# EAGLE board axiom_beta_power_board_v1.25-Min.b0de7db6 (EAGLE 7.7.0), part 1 of 5
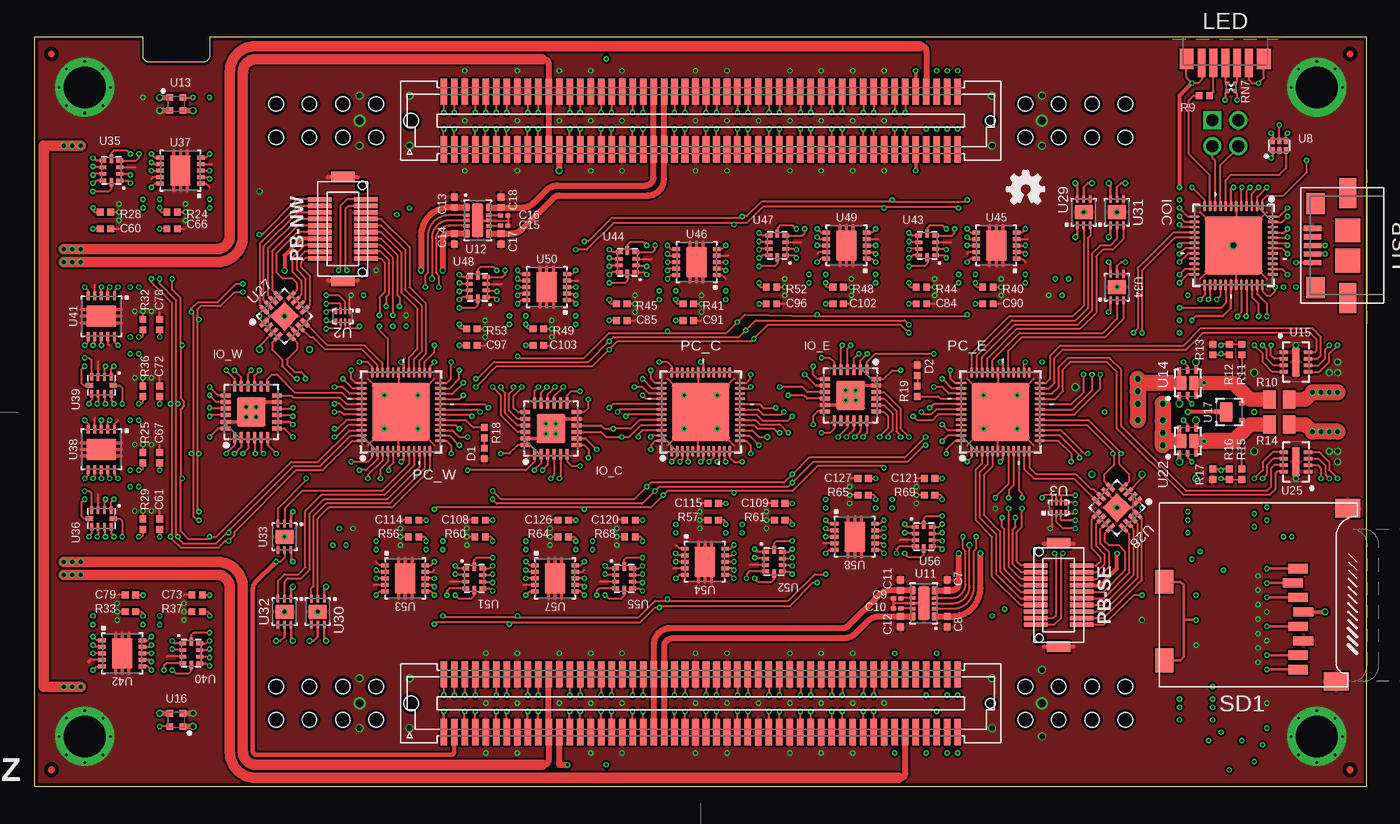
[diagram p0: board, top side]
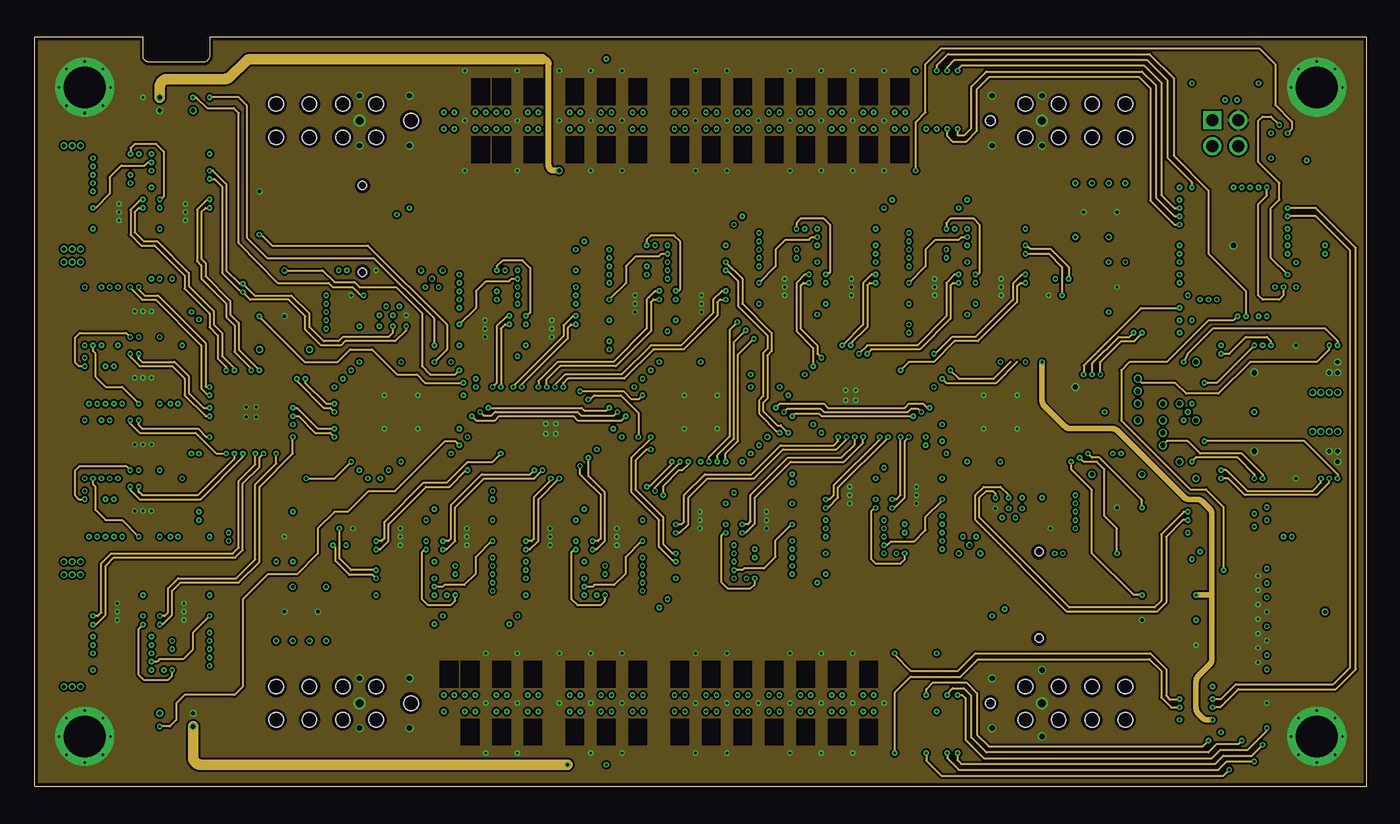
[diagram p1: board, inner layer Route2]
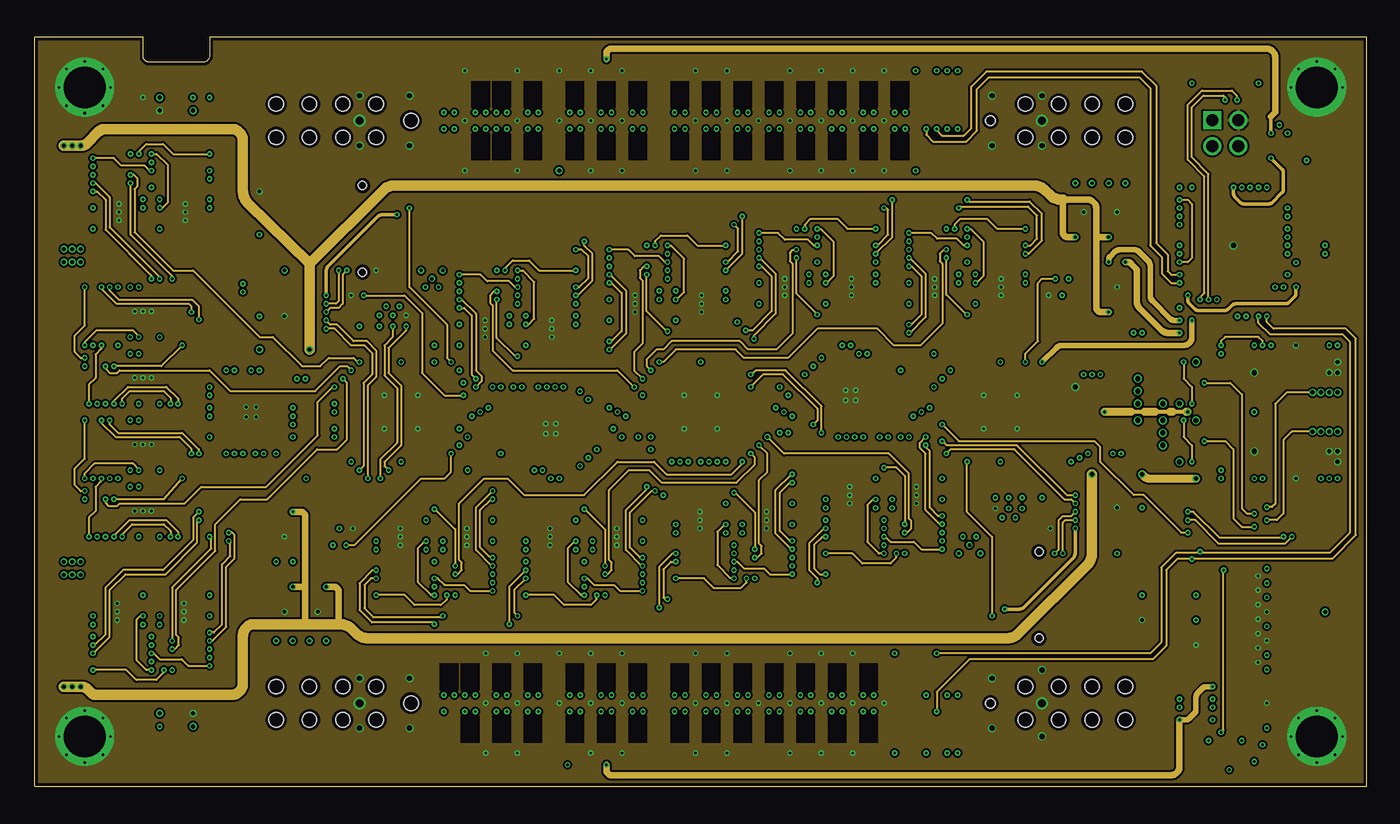
[diagram p2: board, inner layer Route15]
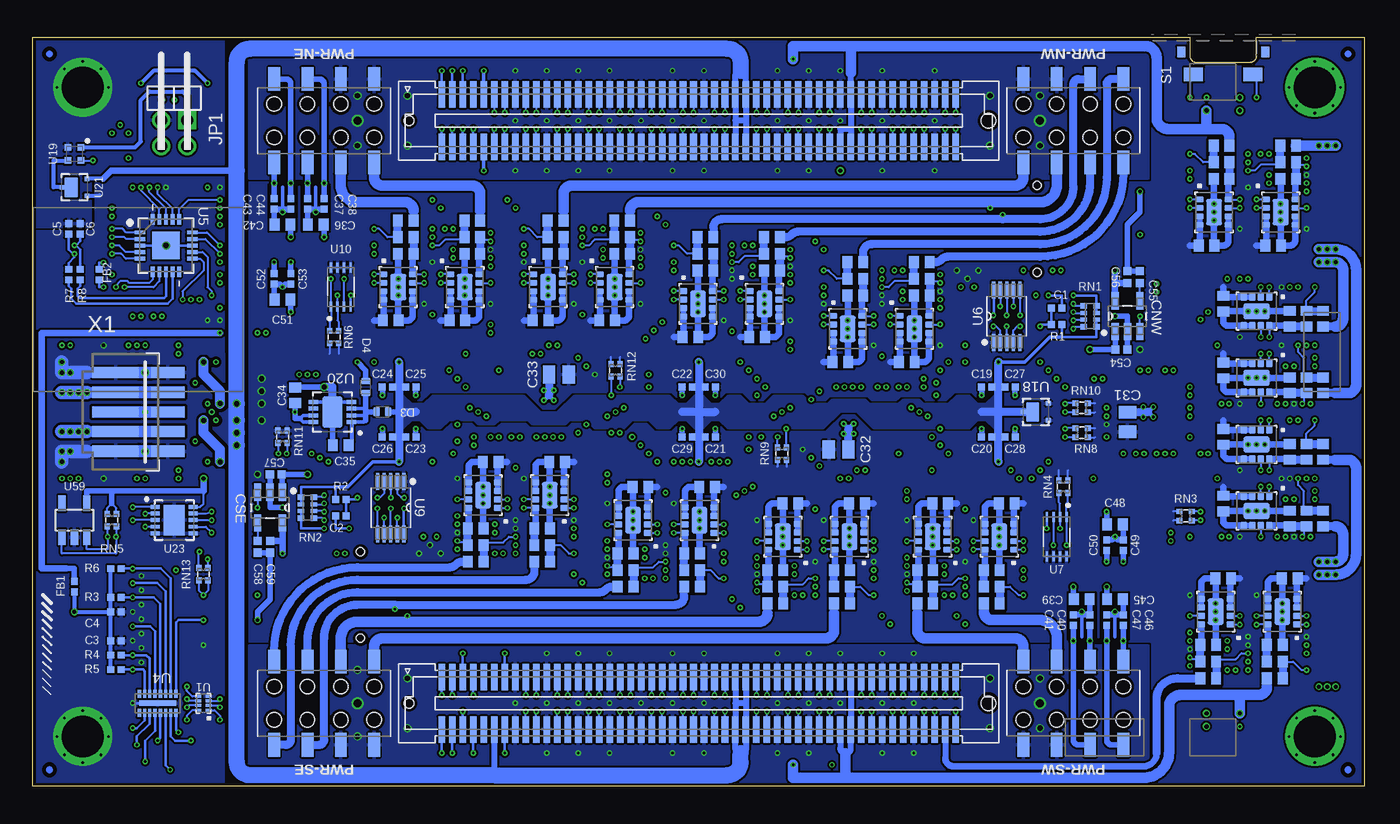
[diagram p3: board, bottom side, seen from below]

Size 101.6 x 57.15 mm. Coordinates in mm from the lower left corner, seen from the top.
Outline: 101.6,57.15 13.33,57.15 13.33,55.75 arc-90 12.83,55.25 8.76,55.25 arc-90 8.25,55.75 8.25,57.15 0,57.15 0,0 101.6,0 101.6,57.15
Copper layers (1*2*15*16): Top 0.035559375mm / dielectric 0.17018125mm / Route2 0.01778125mm / dielectric 47mil / Route15 0.01778125mm / dielectric 0.17018125mm / Bottom 0.035559375mm
Design rules "OSHPark-4layer-tuned *": minimum track width 5mil, minimum drill 8mil, track to track 6mil, track to pad 5mil, pad to pad 5mil, via to via 5mil, smd to smd 0mil, copper to edge 10mil, drill to drill 6mil, minimum pad ring 4mil, minimum via ring 4mil, stop-mask expansion 2mil, vias tented up to drill 25mil, thermal gap 6mil
Net classes: 1 LVDS: width 0.152 mm, drill 0.203 mm, clearance 0.152 mm
tKeepout: area 1.3,50.8 to 6.3,55.9; area 1.3,1.3 to 6.3,6.3; area 95.2,1.3 to 100.3,6.3; area 95.2,50.8 to 100.3,55.9
bKeepout: area 95.2,50.8 to 100.3,55.9; area 95.2,1.3 to 100.3,6.3; area 1.3,1.3 to 6.3,6.3; area 1.3,50.8 to 6.3,55.9

## Footprints (pad centres in the part's own frame; a part is rotated, then mirrored left to right if it is on the bottom)
µZ-SOCKET-NOHOLES-R = smd 0.5 x 2: 1 19.6,24.425; 2 19.6,20.027; 3 18.8,24.425; 4 18.8,20.027; 5 18,24.425; 6 18,20.027; 7 17.2,24.425; 8 17.2,20.027; 9 16.4,24.425; 10 16.4,20.027; 11 15.6,24.425; 12 15.6,20.027; 13 14.8,24.425; 14 14.8,20.027; 15 14,24.425; 16 14,20.027; 17 13.2,24.425; 18 13.2,20.027; 19 12.4,24.425; 20 12.4,20.027; 21 11.6,24.425; 22 11.6,20.027; 23 10.8,24.425; 24 10.8,20.027; 25 10,24.425; 26 10,20.027; 27 9.2,24.425; 28 9.2,20.027; 29 8.4,24.425; 30 8.4,20.027; 31 7.6,24.425; 32 7.6,20.027; 33 6.8,24.425; 34 6.8,20.027; 35 6,24.425; 36 6,20.027; 37 5.2,24.425; 38 5.2,20.027; 39 4.4,24.425; 40 4.4,20.027; 41 3.6,24.425; 42 3.6,20.027; 43 2.8,24.425; 44 2.8,20.027; 45 2,24.425; 46 2,20.027; 47 1.2,24.425; 48 1.2,20.027; 49 0.4,24.425; 50 0.4,20.027; 51 -0.4,24.425; 52 -0.4,20.027; 53 -1.2,24.425; 54 -1.2,20.027; 55 -2,24.425; 56 -2,20.027; 57 -2.8,24.425; 58 -2.8,20.027; 59 -3.6,24.425; 60 -3.6,20.027; 61 -4.4,24.425; 62 -4.4,20.027; 63 -5.2,24.425; 64 -5.2,20.027; 65 -6,24.425; 66 -6,20.027; 67 -6.8,24.425; 68 -6.8,20.027; 69 -7.6,24.425; 70 -7.6,20.027; 71 -8.4,24.425; 72 -8.4,20.027; 73 -9.2,24.425; 74 -9.2,20.027; 75 -10,24.425; 76 -10,20.027; 77 -10.8,24.425; 78 -10.8,20.027; 79 -11.6,24.425; 80 -11.6,20.027; 81 -12.4,24.425; 82 -12.4,20.027; 83 -13.2,24.425; 84 -13.2,20.027; 85 -14,24.425; 86 -14,20.027; 87 -14.8,24.425; 88 -14.8,20.027; 89 -15.6,24.425; 90 -15.6,20.027; 91 -16.4,24.425; 92 -16.4,20.027; 93 -17.2,24.425; 94 -17.2,20.027; 95 -18,24.425; 96 -18,20.027; 97 -18.8,24.425; 98 -18.8,20.027; 99 -19.6,24.425; 100 -19.6,20.027; 101 19.6,-20.025; 102 19.6,-24.425; 103 18.8,-20.027; 104 18.8,-24.425; 105 18,-20.027; 106 18,-24.425; 107 17.2,-20.027; 108 17.2,-24.425; 109 16.4,-20.027; 110 16.4,-24.425; 111 15.6,-20.027; 112 15.6,-24.425; 113 14.8,-20.027; 114 14.8,-24.425; 115 14,-20.027; 116 14,-24.425; 117 13.2,-20.027; 118 13.2,-24.425; 119 12.4,-20.027; 120 12.4,-24.425; 121 11.6,-20.027; 122 11.6,-24.425; 123 10.8,-20.027; 124 10.8,-24.425; 125 10,-20.027; 126 10,-24.425; 127 9.2,-20.027; 128 9.2,-24.425; 129 8.4,-20.027; 130 8.4,-24.425; 131 7.6,-20.027; 132 7.6,-24.425; 133 6.8,-20.027; 134 6.8,-24.425; 135 6,-20.027; 136 6,-24.425; 137 5.2,-20.027; 138 5.2,-24.425; 139 4.4,-20.027; 140 4.4,-24.425; 141 3.6,-20.027; 142 3.6,-24.425; 143 2.8,-20.027; 144 2.8,-24.425; 145 2,-20.027; 146 2,-24.425; 147 1.2,-20.027; 148 1.2,-24.425; 149 0.4,-20.027; 150 0.4,-24.425; 151 -0.4,-20.027; 152 -0.4,-24.425; 153 -1.2,-20.027; 154 -1.2,-24.425; 155 -2,-20.027; 156 -2,-24.425; 157 -2.8,-20.027; 158 -2.8,-24.425; 159 -3.6,-20.027; 160 -3.6,-24.425; 161 -4.4,-20.027; 162 -4.4,-24.425; 163 -5.2,-20.027; 164 -5.2,-24.425; 165 -6,-20.027; 166 -6,-24.425; 167 -6.8,-20.027; 168 -6.8,-24.425; 169 -7.6,-20.027; 170 -7.6,-24.425; 171 -8.4,-20.027; 172 -8.4,-24.425; 173 -9.2,-20.027; 174 -9.2,-24.425; 175 -10,-20.027; 176 -10,-24.425; 177 -10.8,-20.027; 178 -10.8,-24.425; 179 -11.6,-20.027; 180 -11.6,-24.425; 181 -12.4,-20.027; 182 -12.4,-24.425; 183 -13.2,-20.027; 184 -13.2,-24.425; 185 -14,-20.027; 186 -14,-24.425; 187 -14.8,-20.027; 188 -14.8,-24.425; 189 -15.6,-20.027; 190 -15.6,-24.425; 191 -16.4,-20.027; 192 -16.4,-24.425; 193 -17.2,-20.027; 194 -17.2,-24.425; 195 -18,-20.027; 196 -18,-24.425; 197 -18.8,-20.027; 198 -18.8,-24.425; 199 -19.6,-20.027; 200 -19.6,-24.425 | hole 0.725: 22.1,22.225; 22.1,-22.225 | hole 1.125: -22.1,22.225; -22.1,-22.225
0402-C = smd 0.52 x 0.52: 1 -0.4,0; 2 0.4,0
0201-C = smd 0.36 x 0.32: 1 -0.28,0; 2 0.28,0
0805-C = smd 0.95 x 1.35: 1 -0.75,0; 2 0.75,0
0603-C = smd 0.75 x 0.9: 1 -0.6,0; 2 0.6,0
0402-B = smd 0.62 x 0.62: 1 -0.45,0; 2 0.45,0
SOT95P280X145-5N = smd 1.321 x 0.559: 1 -1.168,0.94; 2 -1.168,0; 3 -1.168,-0.94; 4 1.168,-0.94; 5 1.168,0.94
DFN1006D-2 = smd 0.5 x 0.7: A 0.45,0; C -0.45,0
QFN50P400X400X80-25N-NSM = smd 0.813 x 0.305: 1 -1.95,1.25; 2 -1.95,0.75; 3 -1.95,0.25; 4 -1.95,-0.25; 5 -1.95,-0.75; 6 -1.95,-1.25; 13 1.95,-1.25; 14 1.95,-0.75; 15 1.95,-0.25; 16 1.95,0.25; 17 1.95,0.75; 18 1.95,1.25 | smd 0.305 x 0.813: 7 -1.25,-1.95; 8 -0.75,-1.95; 9 -0.25,-1.95; 10 0.25,-1.95; 11 0.75,-1.95; 12 1.25,-1.95; 19 1.25,1.95; 20 0.75,1.95; 21 0.25,1.95; 22 -0.25,1.95; 23 -0.75,1.95; 24 -1.25,1.95 | smd 2.2 x 2.2: 25 0,0
UQFN40P600X600X100-49N-NSM = smd 0.8 x 0.2: 1 -3,2.2; 2 -3,1.8; 3 -3,1.4; 4 -3,1; 5 -3,0.6; 6 -3,0.2; 7 -3,-0.2; 8 -3,-0.6; 9 -3,-1; 10 -3,-1.4; 11 -3,-1.8; 12 -3,-2.2; 25 3,-2.2; 26 3,-1.8; 27 3,-1.4; 28 3,-1; 29 3,-0.6; 30 3,-0.2; 31 3,0.2; 32 3,0.6; 33 3,1; 34 3,1.4; 35 3,1.8; 36 3,2.2 | smd 0.2 x 0.8: 13 -2.2,-3; 14 -1.8,-3; 15 -1.4,-3; 16 -1,-3; 17 -0.6,-3; 18 -0.2,-3; 19 0.2,-3; 20 0.6,-3; 21 1,-3; 22 1.4,-3; 23 1.8,-3; 24 2.2,-3; 37 2.2,3; 38 1.8,3; 39 1.4,3; 40 1,3; 41 0.6,3; 42 0.2,3; 43 -0.2,3; 44 -0.6,3; 45 -1,3; 46 -1.4,3; 47 -1.8,3; 48 -2.2,3 | smd 4.4 x 4.4: EP 0,0
2X02M/90-S = drill 0.914 square: 1 1,1 | drill 0.914: 2 1,-1; 3 -1,1; 4 -1,-1
MSL0104 = smd 1.06 x 1.58: 1 -2.95,-1; 7 2.95,-1 | smd 0.6 x 2.18: 2 -1.8,-1.3; 3 -0.9,-1.3; 4 0,-1.3; 5 0.9,-1.3; 6 1.8,-1.3
DF12(XX)-20DP-0.5V = smd 1.8 x 0.35: 1 -1.75,2.25; 2 1.75,2.25; 3 -1.75,1.75; 4 1.75,1.75; 5 -1.75,1.25; 6 1.75,1.25; 7 -1.75,0.75; 8 1.75,0.75; 9 -1.75,0.25; 10 1.75,0.25; 11 -1.75,-0.25; 12 1.75,-0.25; 13 -1.75,-0.75; 14 1.75,-0.75; 15 -1.75,-1.25; 16 1.75,-1.25; 17 -1.75,-1.75; 18 1.75,-1.75; 19 -1.75,-2.25; 20 1.75,-2.25 | smd 1.8 x 0.8: M1 0,3.95; M2 0,-3.95 | hole 0.625: 1.5,-3.3; 1.5,3.3
R2X04 = smd 0.9 x 1.8: 1 -3.81,3.175; 2 -3.81,-3.175; 3 -1.27,3.175; 4 -1.27,-3.175; 5 1.27,3.175; 6 1.27,-3.175; 7 3.81,3.175; 8 3.81,-3.175 | hole 1.1: -3.81,1.27; -1.27,1.27; -1.27,-1.27; -3.81,-1.27; 1.27,1.27; 1.27,-1.27; 3.81,1.27; 3.81,-1.27
4X0402ARV341 = smd 0.4 x 0.5: 1 -0.8,-0.5; 4 0.8,-0.5; 5 0.8,0.5; 8 -0.8,0.5 | smd 0.3 x 0.5: 2 -0.25,-0.5; 3 0.25,-0.5; 6 0.25,0.5; 7 -0.25,0.5
EXB24V = smd 0.4 x 0.45: 1 -0.35,-0.475; 2 0.35,-0.475; 3 0.35,0.475; 4 -0.35,0.475
EXB14V = smd 0.3 x 0.3: 1 -0.3,-0.3; 2 0.3,-0.3; 3 0.3,0.3; 4 -0.3,0.3
SKSNLAE010 = smd 1.45 x 1.05: 1 -2.275,2.575; 2 2.275,2.575 | smd 0.6 x 0.8: 3 -3.2,0.85; 4 3.2,0.85
TF-MICRO-SD_PP2 = smd 0.7 x 1.5: 1 9,-10.64; 2 7.9,-10.24; 3 6.8,-10.64; 4 5.7,-11.04; 5 4.6,-10.64; 6 3.5,-11.04; 7 2.4,-10.64; 8 1.3,-10.64 | smd 1.8 x 1.4: CD1 2,-0.44; CD2 8,-0.44 | smd 1.4 x 1.9: MT1 0.4,-13.54; MT2 13.6,-14.44
X2SON-8 = smd 0.2 x 0.52: 1 -0.525,-0.4; 2 -0.175,-0.4; 3 0.175,-0.4; 4 0.525,-0.4; 5 0.525,0.4; 6 0.175,0.4; 7 -0.175,0.4; 8 -0.525,0.4
UDFN-8 = smd 0.22 x 0.48: 1 -0.525,-0.43; 2 -0.175,-0.43; 3 0.175,-0.43; 4 0.525,-0.43; 5 0.525,0.43; 6 0.175,0.43; 7 -0.175,0.43; 8 -0.525,0.43
SON40P135X330X55-17N = smd 0.61 x 0.254: 1 -0.737,1.397; 2 -0.737,0.991; 3 -0.737,0.61; 4 -0.737,0.203; 5 -0.737,-0.203; 6 -0.737,-0.61; 7 -0.737,-0.991; 8 -0.737,-1.397; 9 0.737,-1.397; 10 0.737,-0.991; 11 0.737,-0.61; 12 0.737,-0.203; 13 0.737,0.203; 14 0.737,0.61; 15 0.737,0.991; 16 0.737,1.397 | smd 0.406 x 2.794: 17 0,0
QFN65P400X400X100-21N = smd 0.8 x 0.3: 1 -2,1; 2 -2,0.5; 3 -2,0; 4 -2,-0.5; 5 -2,-1; 11 2,-1; 12 2,-0.5; 13 2,0; 14 2,0.5; 15 2,1 | smd 0.3 x 0.8: 6 -1,-2; 7 -0.5,-2; 8 0,-2; 9 0.5,-2; 10 1,-2; 16 1,2; 17 0.5,2; 18 0,2; 19 -0.5,2; 20 -1,2 | smd 2.1 x 2.1: EP 0,0
SOP50P490X110-10N = smd 1.3 x 0.32: 1 -2,1; 2 -2,0.5; 3 -2,0; 4 -2,-0.5; 5 -2,-1; 6 2,-1; 7 2,-0.5; 8 2,0; 9 2,0.5; 10 2,1
SOT996-2/3 = smd 0.25 x 0.75: 1 -0.75,-1.5; 2 -0.25,-1.5; 3 0.25,-1.5; 4 0.75,-1.5; 5 0.75,1.5; 6 0.25,1.5; 7 -0.25,1.5; 8 -0.75,1.5
MICROPAK-6 = smd 0.3 x 0.5: 1 -0.5,-0.375; 2 0,-0.375; 3 0.5,-0.375; 4 0.5,0.375; 5 0,0.375; 6 -0.5,0.375
V-DFN3020-14 = smd 0.65 x 0.5: 1 -1,-0.85; 5 1,-0.85; 6 1,0.85; 10 -1,0.85 | smd 0.25 x 0.5: 2 -0.4,-0.85; 3 0,-0.85; 4 0.4,-0.85; 7 0.4,0.85; 8 0,0.85; 9 -0.4,0.85 | smd 2.55 x 0.9: EP 0,0
MLF-4 = smd 0.5 x 0.5: 1 -0.5,-0.5; 2 0.5,-0.5; 3 0.5,0.5; 4 -0.5,0.5
UDFN6 = smd 0.47 x 0.35: 1 -0.95,0.65; 2 -0.95,0; 3 -0.95,-0.65; 4 0.95,-0.65; 5 0.95,0; 6 0.95,0.65 | smd 1.1 x 0.75: D1 0,0.46; D2 0,-0.46
DFN8 = smd 0.25 x 0.7: 1 -0.75,-0.925; 2 -0.25,-0.925; 3 0.25,-0.925; 4 0.75,-0.925; 5 0.75,0.925; 6 0.25,0.925; 7 -0.25,0.925; 8 -0.75,0.925 | smd 2.2 x 0.6: EP 0,0
DFN2020D-3 = smd 0.45 x 0.35: 1 -0.95,0.65; 2 -0.95,-0.65; 3 0.95,0 | smd 1 x 1.5: 4 0.25,0
DFN3X3_8LEAD = smd 0.813 x 0.305: 1 -1.448,0.762; 2 -1.448,0.254; 3 -1.448,-0.254; 4 -1.448,-0.762; 5 1.448,-0.762; 6 1.448,-0.254; 7 1.448,0.254; 8 1.448,0.762 | smd 1.549 x 2.388: 9 0,0
DFN3X3_10LEAD = smd 0.7 x 0.3: 1 -1.45,1; 2 -1.45,0.5; 3 -1.45,0; 4 -1.45,-0.5; 5 -1.45,-1; 6 1.45,-1; 7 1.45,-0.5; 8 1.45,0; 9 1.45,0.5; 10 1.45,1 | smd 1.6 x 2.3: EPAD 0,0
QFN50P300X300X80-17N = smd 0.8 x 0.3: 1 -1.45,0.75; 2 -1.45,0.25; 3 -1.45,-0.25; 4 -1.45,-0.75; 9 1.45,-0.75; 10 1.45,-0.25; 11 1.45,0.25; 12 1.45,0.75 | smd 0.3 x 0.8: 5 -0.75,-1.45; 6 -0.25,-1.45; 7 0.25,-1.45; 8 0.75,-1.45; 13 0.75,1.45; 14 0.25,1.45; 15 -0.25,1.45; 16 -0.75,1.45 | smd 1.55 x 1.55: EP 0,0
DFN2018-6 = smd 0.25 x 0.55: 1 -0.5,-1; 2 0,-1; 3 0.5,-1; 4 0.5,1; 5 0,1; 6 -0.5,1 | smd 1.4 x 1.1: 10 0,0
X2QFN-10 = smd 0.3 x 0.58: 1 -0.75,-0.64; 4 0.75,-0.64; 6 0.75,0.64; 9 -0.75,0.64 | smd 0.25 x 0.58: 2 -0.25,-0.64; 3 0.25,-0.64; 7 0.25,0.64; 8 -0.25,0.64 | smd 0.64 x 0.35: 5 0.9,0; 10 -0.9,0
DFN-10 = smd 0.3 x 0.65: 1 -1,-1.55; 2 -0.5,-1.55; 3 0,-1.55; 4 0.5,-1.55; 5 1,-1.55; 6 1,1.55; 7 0.5,1.55; 8 0,1.55; 9 -0.5,1.55; 10 -1,1.55 | smd 2.3 x 1.6: EP 0,0
SOT23-5L = smd 0.55 x 1.2: 1 -0.95,-1.3; 2 0,-1.3; 3 0.95,-1.3; 4 0.95,1.3; 5 -0.95,1.3
MICROSIP = smd 0.48 x 0.58: 1 -0.975,-1.1; 2 -0.325,-1.1; 3 0.325,-1.1; 4 0.975,-1.1; 5 0.975,1.1; 6 0.325,1.1; 7 -0.325,1.1; 8 -0.975,1.1 | smd 2 x 1.2: EP 0,0
MICROSIP-DD = smd 0.48 x 0.58: 1 -0.975,-1.1; 2 -0.325,-1.1; 3 0.325,-1.1; 4 0.975,-1.1; 5 0.975,1.1; 6 0.325,1.1; 7 -0.325,1.1; 8 -0.975,1.1 | smd 2 x 1.2: EP 0,0
MICRO-AB-H-SMT = smd 0.4 x 1.35: 1 -1.3,4.125; 2 -0.65,4.125; 3 0,4.125; 4 0.65,4.125; 5 1.3,4.125 | smd 2.3 x 1.3: Z1 -4,1.45; Z4 4,1.45 | smd 1.8 x 1.9: Z2 -1.15,1.45; Z3 1.15,1.45 | smd 1.6 x 1.4: Z5 -3.2,3.9; Z6 3.2,3.9
PICO-SPOX-5 = smd 0.85 x 2.55: 1 -3,-6.5; 2 -1.5,-6.5; 3 0,-6.5; 4 1.5,-6.5; 5 3,-6.5 | smd 0.85 x 3.55: 1A -3,-2.5; 2A -1.5,-2.5; 3A 0,-2.5; 4A 1.5,-2.5; 5A 3,-2.5
µZ-CONONLY = smd 0.5 x 2: 1 19.6,-24.226; 2 19.6,-20.226; 3 18.8,-24.226; 4 18.8,-20.226; 5 18,-24.226; 6 18,-20.226; 7 17.2,-24.226; 8 17.2,-20.226; 9 16.4,-24.226; 10 16.4,-20.226; 11 15.6,-24.226; 12 15.6,-20.226; 13 14.8,-24.226; 14 14.8,-20.226; 15 14,-24.226; 16 14,-20.226; 17 13.2,-24.226; 18 13.2,-20.226; 19 12.4,-24.226; 20 12.4,-20.226; 21 11.6,-24.226; 22 11.6,-20.226; 23 10.8,-24.226; 24 10.8,-20.226; 25 10,-24.226; 26 10,-20.226; 27 9.2,-24.226; 28 9.2,-20.226; 29 8.4,-24.226; 30 8.4,-20.226; 31 7.6,-24.226; 32 7.6,-20.226; 33 6.8,-24.226; 34 6.8,-20.226; 35 6,-24.226; 36 6,-20.226; 37 5.2,-24.226; 38 5.2,-20.226; 39 4.4,-24.226; 40 4.4,-20.226; 41 3.6,-24.226; 42 3.6,-20.226; 43 2.8,-24.226; 44 2.8,-20.226; 45 2,-24.226; 46 2,-20.226; 47 1.2,-24.226; 48 1.2,-20.226; 49 0.4,-24.226; 50 0.4,-20.226; 51 -0.4,-24.226; 52 -0.4,-20.226; 53 -1.2,-24.226; 54 -1.2,-20.226; 55 -2,-24.226; 56 -2,-20.226; 57 -2.8,-24.226; 58 -2.8,-20.226; 59 -3.6,-24.226; 60 -3.6,-20.226; 61 -4.4,-24.226; 62 -4.4,-20.226; 63 -5.2,-24.226; 64 -5.2,-20.226; 65 -6,-24.226; 66 -6,-20.226; 67 -6.8,-24.226; 68 -6.8,-20.226; 69 -7.6,-24.226; 70 -7.6,-20.226; 71 -8.4,-24.226; 72 -8.4,-20.226; 73 -9.2,-24.226; 74 -9.2,-20.226; 75 -10,-24.226; 76 -10,-20.226; 77 -10.8,-24.226; 78 -10.8,-20.226; 79 -11.6,-24.226; 80 -11.6,-20.226; 81 -12.4,-24.226; 82 -12.4,-20.226; 83 -13.2,-24.226; 84 -13.2,-20.226; 85 -14,-24.226; 86 -14,-20.226; 87 -14.8,-24.226; 88 -14.8,-20.226; 89 -15.6,-24.226; 90 -15.6,-20.226; 91 -16.4,-24.226; 92 -16.4,-20.226; 93 -17.2,-24.226; 94 -17.2,-20.226; 95 -18,-24.226; 96 -18,-20.226; 97 -18.8,-24.226; 98 -18.8,-20.226; 99 -19.6,-24.226; 100 -19.6,-20.226; 101 19.6,20.226; 102 19.6,24.226; 103 18.8,20.226; 104 18.8,24.226; 105 18,20.226; 106 18,24.226; 107 17.2,20.226; 108 17.2,24.226; 109 16.4,20.226; 110 16.4,24.226; 111 15.6,20.226; 112 15.6,24.226; 113 14.8,20.226; 114 14.8,24.226; 115 14,20.226; 116 14,24.226; 117 13.2,20.226; 118 13.2,24.226; 119 12.4,20.226; 120 12.4,24.226; 121 11.6,20.226; 122 11.6,24.226; 123 10.8,20.226; 124 10.8,24.226; 125 10,20.226; 126 10,24.226; 127 9.2,20.226; 128 9.2,24.226; 129 8.4,20.226; 130 8.4,24.226; 131 7.6,20.226; 132 7.6,24.226; 133 6.8,20.226; 134 6.8,24.226; 135 6,20.226; 136 6,24.226; 137 5.2,20.226; 138 5.2,24.226; 139 4.4,20.226; 140 4.4,24.226; 141 3.6,20.226; 142 3.6,24.226; 143 2.8,20.226; 144 2.8,24.226; 145 2,20.226; 146 2,24.226; 147 1.2,20.226; 148 1.2,24.226; 149 0.4,20.226; 150 0.4,24.226; 151 -0.4,20.226; 152 -0.4,24.226; 153 -1.2,20.226; 154 -1.2,24.226; 155 -2,20.226; 156 -2,24.226; 157 -2.8,20.226; 158 -2.8,24.226; 159 -3.6,20.226; 160 -3.6,24.226; 161 -4.4,20.226; 162 -4.4,24.226; 163 -5.2,20.226; 164 -5.2,24.226; 165 -6,20.226; 166 -6,24.226; 167 -6.8,20.226; 168 -6.8,24.226; 169 -7.6,20.226; 170 -7.6,24.226; 171 -8.4,20.226; 172 -8.4,24.226; 173 -9.2,20.226; 174 -9.2,24.226; 175 -10,20.226; 176 -10,24.226; 177 -10.8,20.226; 178 -10.8,24.226; 179 -11.6,20.226; 180 -11.6,24.226; 181 -12.4,20.226; 182 -12.4,24.226; 183 -13.2,20.226; 184 -13.2,24.226; 185 -14,20.226; 186 -14,24.226; 187 -14.8,20.226; 188 -14.8,24.226; 189 -15.6,20.226; 190 -15.6,24.226; 191 -16.4,20.226; 192 -16.4,24.226; 193 -17.2,20.226; 194 -17.2,24.226; 195 -18,20.226; 196 -18,24.226; 197 -18.8,20.226; 198 -18.8,24.226; 199 -19.6,20.226; 200 -19.6,24.226 | hole 1.125: -22.1,-22.225; -22.1,22.225 | hole 0.725: 22.1,-22.225; 22.1,22.225

## Placement (x,y rotation side)
BETA  µZ-FCI-SOCKET-NOHOLES-R  [µZ-SOCKET-NOHOLES-R]  50.8,28.57 0 top
C1  10n  [0402-C]  23.49,36.51 0 bottom
C2  10n  [0402-C]  78.1,20.64 180 bottom
C3  1u  [0402-C]  95.25,11.12 0 bottom
C4  100n  [0402-C]  95.25,13.32 0 bottom
C5  [0402-C]  98.87,42.55 90 bottom
C6  [0402-C]  97.98,42.55 90 bottom
C7  [0402-C]  69.6,15.37 90 top
C8  [0402-C]  69.6,12.57 270 top
C9  [0201-C]  65.79,14.35 180 top
C10  [0201-C]  65.79,13.59 180 top
C11  [0402-C]  66.04,15.37 90 top
C12  [0402-C]  66.04,12.57 270 top
C13  [0402-C]  32,44.58 90 top
C14  [0402-C]  32,41.78 270 top
C15  [0201-C]  35.81,42.8 0 top
C16  [0201-C]  35.81,43.56 0 top
C17  [0402-C]  35.56,41.78 270 top
C18  [0402-C]  35.56,44.58 90 top
C19  100n  [0402-C]  28.83,30.48 180 bottom
C20  100n  [0402-C]  28.83,26.67 180 bottom
C21  100n  [0402-C]  49.91,26.67 0 bottom
C22  100n  [0402-C]  51.69,30.48 180 bottom
C23  100n  [0402-C]  72.77,26.67 0 bottom
C24  100n  [0402-C]  74.55,30.48 180 bottom
C25  4u7  [0402-C]  72.77,30.48 0 bottom
C26  4u7  [0402-C]  74.55,26.67 180 bottom
C27  4u7  [0402-C]  27.05,30.48 0 bottom
C28  4u7  [0402-C]  27.05,26.67 0 bottom
C29  4u7  [0402-C]  51.69,26.67 180 bottom
C30  4u7  [0402-C]  49.91,30.48 0 bottom
C31  47u  [0805-C]  18.1,27.81 90 bottom
C32  47u  [0805-C]  40.13,25.72 0 bottom
C33  47u  [0805-C]  61.47,31.43 180 bottom
C34  10u  [0603-C]  81.6,29.84 90 bottom
C35  10u  [0603-C]  78.1,26.04 180 bottom
C36  4u7  [0603-C]  80.01,42.86 180 bottom
C37  1u  [0402-C]  80.64,44.45 270 bottom
C38  1u  [0402-C]  79.38,44.45 270 bottom
C39  4u7  [0603-C]  21.59,14.29 0 bottom
C40  1u  [0402-C]  20.95,12.7 90 bottom
C41  1u  [0402-C]  22.22,12.7 90 bottom
C42  4u7  [0603-C]  82.55,42.86 180 bottom
C43  1u  [0402-C]  83.19,44.45 270 bottom
C44  1u  [0402-C]  81.91,44.45 270 bottom
C45  4u7  [0603-C]  19.05,14.29 0 bottom
C46  1u  [0402-C]  18.41,12.7 90 bottom
C47  1u  [0402-C]  19.68,12.7 90 bottom
C48  4u7  [0603-C]  19.05,20 0 bottom
C49  1u  [0402-C]  18.41,18.41 90 bottom
C50  1u  [0402-C]  19.68,18.41 90 bottom
C51  4u7  [0603-C]  82.55,37.15 180 bottom
C52  1u  [0402-C]  83.19,38.73 270 bottom
C53  1u  [0402-C]  81.91,38.73 270 bottom
C54  1u  [0402-B]  18.57,33.34 0 bottom
C55  10n  [0402-B]  17.14,38.86 90 bottom
C56  1u  [0402-B]  18.1,38.86 90 bottom
C57  1u  [0402-B]  83.06,23.81 180 bottom
C58  10n  [0402-B]  84.45,18.29 270 bottom
C59  1u  [0402-B]  83.5,18.29 270 bottom
C60  [0402-C]  5.4,42.55 0 top
C61  [0402-C]  9.52,20 90 top
C62  [0603-C]  12.06,41.27 0 bottom
C63  [0603-C]  10.92,46.36 180 bottom
C64  [0603-C]  10.79,26.67 270 bottom
C65  [0603-C]  5.71,25.53 90 bottom
C66  [0402-C]  10.48,42.55 0 top
C67  [0402-C]  9.52,25.08 90 top
C68  [0603-C]  6.98,41.27 0 bottom
C69  [0603-C]  5.84,46.36 180 bottom
C70  [0603-C]  10.79,21.59 270 bottom
C71  [0603-C]  5.71,20.45 90 bottom
C72  [0402-C]  9.52,30.16 90 top
C73  [0402-C]  12.38,14.6 180 top
C74  [0603-C]  10.79,36.83 270 bottom
C75  [0603-C]  5.71,35.69 90 bottom
C76  [0603-C]  5.71,15.88 180 bottom
C77  [0603-C]  6.86,10.79 0 bottom
C78  [0402-C]  9.52,35.24 90 top
C79  [0402-C]  7.3,14.6 180 top
C80  [0603-C]  10.79,31.75 270 bottom
C81  [0603-C]  5.71,30.61 90 bottom
C82  [0603-C]  10.79,15.88 180 bottom
C83  [0603-C]  11.94,10.79 0 bottom
C84  [0402-C]  67.63,36.83 0 top
C85  [0402-C]  44.77,35.56 0 top
C86  [0603-C]  74.3,35.56 0 bottom
C87  [0603-C]  73.15,40.64 180 bottom
C88  [0603-C]  51.43,34.29 0 bottom
C89  [0603-C]  50.29,39.37 180 bottom
C90  [0402-C]  72.71,36.83 0 top
C91  [0402-C]  49.85,35.56 0 top
C92  [0603-C]  69.22,35.56 0 bottom
C93  [0603-C]  68.07,40.64 180 bottom
C94  [0603-C]  46.35,34.29 0 bottom
C95  [0603-C]  45.21,39.37 180 bottom
C96  [0402-C]  56.2,36.83 0 top
C97  [0402-C]  33.34,33.66 0 top
C98  [0603-C]  62.86,35.56 0 bottom
C99  [0603-C]  61.72,40.64 180 bottom
C100  [0603-C]  40,32.38 0 bottom
C101  [0603-C]  38.86,37.47 180 bottom
C102  [0402-C]  61.28,36.83 0 top
C103  [0402-C]  38.42,33.66 0 top
C104  [0603-C]  57.78,35.56 0 bottom
C105  [0603-C]  56.64,40.64 180 bottom
C106  [0603-C]  34.92,32.38 0 bottom
C107  [0603-C]  33.78,37.47 180 bottom
C108  [0402-C]  33.97,20.32 180 top
C109  [0402-C]  56.83,21.59 180 top
C110  [0603-C]  27.3,21.59 180 bottom
C111  [0603-C]  28.45,16.51 0 bottom
C112  [0603-C]  50.16,22.86 180 bottom
C113  [0603-C]  51.31,17.78 0 bottom
C114  [0402-C]  28.89,20.32 180 top
C115  [0402-C]  51.75,21.59 180 top
C116  [0603-C]  32.38,21.59 180 bottom
C117  [0603-C]  33.53,16.51 0 bottom
C118  [0603-C]  55.24,22.86 180 bottom
C119  [0603-C]  56.39,17.78 0 bottom
C120  [0402-C]  45.4,20.32 180 top
C121  [0402-C]  68.26,23.49 180 top
C122  [0603-C]  38.73,21.59 180 bottom
C123  [0603-C]  39.88,16.51 0 bottom
C124  [0603-C]  61.59,24.77 180 bottom
C125  [0603-C]  62.74,19.68 0 bottom
C126  [0402-C]  40.32,20.32 180 top
C127  [0402-C]  63.18,23.49 180 top
C128  [0603-C]  43.81,21.59 180 bottom
C129  [0603-C]  44.96,16.51 0 bottom
C130  [0603-C]  66.67,24.77 180 bottom
C131  [0603-C]  67.82,19.68 0 bottom
CNW  SPX3819M5-L  [SOT95P280X145-5N]  18.1,35.88 90 bottom
CSE  SPX3819M5-L  [SOT95P280X145-5N]  83.5,21.27 270 bottom
D1  [0402-C]  34.29,25.4 270 top
D2  [0402-C]  67.31,31.75 90 top
D3  PMEG2010BELD  [DFN1006D-2]  74.93,28.57 180 bottom
D4  PMEG2010BELD  [DFN1006D-2]  76.2,30.48 270 bottom
F1  FIDUCIAL  [FID_ARROW]  1.27,55.88 0 top
F2  FIDUCIAL  [FID_ARROW]  100.33,55.88 0 top
F3  FIDUCIAL  [FID_ARROW]  100.33,1.27 0 top
F4  FIDUCIAL  [FID_ARROW]  1.27,1.27 0 top
F5  FIDUCIAL  [FID_ARROW]  100.33,55.88 0 bottom
F6  FIDUCIAL  [FID_ARROW]  1.27,55.88 0 bottom
F7  FIDUCIAL  [FID_ARROW]  1.27,1.27 0 bottom
F8  FIDUCIAL  [FID_ARROW]  100.33,1.27 0 bottom
FB1  [0402-C]  98.42,15.24 270 bottom
FB2  [0402-C]  96.52,39.05 90 bottom
FB3  [0603-C]  10.92,48.89 0 bottom
FB4  [0603-C]  3.17,25.53 270 bottom
FB5  [0603-C]  5.84,48.89 0 bottom
FB6  [0603-C]  3.17,20.45 270 bottom
FB7  [0603-C]  3.17,35.69 270 bottom
FB8  [0603-C]  6.86,8.25 180 bottom
FB9  [0603-C]  3.17,30.61 270 bottom
FB10  [0603-C]  11.94,8.25 180 bottom
FB11  [0603-C]  73.15,43.18 0 bottom
FB12  [0603-C]  50.29,41.91 0 bottom
FB13  [0603-C]  68.07,43.18 0 bottom
FB14  [0603-C]  45.21,41.91 0 bottom
FB15  [0603-C]  61.72,43.18 0 bottom
FB16  [0603-C]  38.86,40 0 bottom
FB17  [0603-C]  56.64,43.18 0 bottom
FB18  [0603-C]  33.78,40 0 bottom
FB19  [0603-C]  28.45,13.97 180 bottom
FB20  [0603-C]  51.31,15.24 180 bottom
FB21  [0603-C]  33.53,13.97 180 bottom
FB22  [0603-C]  56.39,15.24 180 bottom
FB23  [0603-C]  39.88,13.97 180 bottom
FB24  [0603-C]  62.74,17.14 180 bottom
FB25  [0603-C]  44.96,13.97 180 bottom
FB26  [0603-C]  67.82,17.14 180 bottom
IO_C  MCP23018  [QFN50P400X400X80-25N-NSM]  39.37,27.3 90 top
IO_E  MCP23018  [QFN50P400X400X80-25N-NSM]  62.23,29.84 270 top
IO_W  MCP23018  [QFN50P400X400X80-25N-NSM]  16.51,28.57 90 top
IOC  PIC16F15386  [UQFN40P600X600X100-49N-NSM]  91.44,41.27 270 top
JP1  [2X02M/90-S]  90.81,49.85 0 bottom
LED  MSL0104RGB  [MSL0104]  90.81,56.52 0 top
LOGO2  OSHW_LOGO_FILLX0100-NT  [OSHW_FILLX100_NOTEXT]  74.17,44.45 0 top
PB-NW  DF12(XX)-20DP-0.5V  [DF12(XX)-20DP-0.5V]  23.49,42.55 0 top
PB-SE  DF12(XX)-20DP-0.5V  [DF12(XX)-20DP-0.5V]  78.1,14.6 180 top
PC_C  PIC16F15386  [UQFN40P600X600X100-49N-NSM]  50.8,28.57 90 top
PC_E  PIC16F15386  [UQFN40P600X600X100-49N-NSM]  73.66,28.57 90 top
PC_W  PIC16F15386  [UQFN40P600X600X100-49N-NSM]  27.94,28.57 90 top
PWR-NE  PINRC-2X04  [R2X04]  79.38,50.8 180 bottom  (not fitted)
PWR-NW  PINRC-2X04  [R2X04]  22.22,50.8 0 bottom  (not fitted)
PWR-SE  PINRC-2X04  [R2X04]  79.38,6.35 180 bottom  (not fitted)
PWR-SW  PINRC-2X04  [R2X04]  22.22,6.35 0 bottom  (not fitted)
R1  200k  [0402-C]  23.49,35.24 180 bottom
R2  200k  [0402-C]  78.1,21.91 0 bottom
R3  50k  [0402-C]  95.25,14.42 0 bottom  (not fitted)
R4  50k  [0402-C]  95.25,10.02 0 bottom  (not fitted)
R5  50k  [0402-C]  95.25,8.92 0 bottom  (not fitted)
R6  50k  [0402-C]  95.25,16.62 0 bottom  (not fitted)
R7  [0402-C]  98.87,39.05 270 bottom
R8  [0402-C]  97.98,39.05 270 bottom
R9  [0402-C]  89.22,52.7 180 top
R10  [0805-C]  94.93,29.53 180 top
R11  [0402-C]  92.07,33.34 90 top
R12  [0402-C]  91.12,33.34 270 top
R13  [0402-C]  89.85,33.34 90 top
R14  [0805-C]  94.93,27.62 180 top
R15  [0402-C]  92.07,23.81 270 top
R16  [0402-C]  91.12,23.81 90 top
R17  [0402-C]  89.85,23.81 270 top
R18  [0402-C]  34.29,26.99 270 top
R19  [0402-C]  67.31,30.16 90 top
R22  [0603-C]  10.92,47.62 180 bottom
R23  [0603-C]  4.45,25.53 90 bottom
R24  [0402-C]  10.48,43.81 180 top
R25  [0402-C]  8.25,25.08 270 top
R26  [0603-C]  5.84,47.62 180 bottom
R27  [0603-C]  4.45,20.45 90 bottom
R28  [0402-C]  5.4,43.81 180 top
R29  [0402-C]  8.25,20 270 top
R30  [0603-C]  4.45,35.69 90 bottom
R31  [0603-C]  6.86,9.52 0 bottom
R32  [0402-C]  8.25,35.24 270 top
R33  [0402-C]  7.3,13.33 0 top
R34  [0603-C]  4.45,30.61 90 bottom
R35  [0603-C]  11.94,9.52 0 bottom
R36  [0402-C]  8.25,30.16 270 top
R37  [0402-C]  12.38,13.33 0 top
R38  [0603-C]  73.15,41.91 180 bottom
R39  [0603-C]  50.29,40.64 180 bottom
R40  [0402-C]  72.71,38.1 180 top
R41  [0402-C]  49.85,36.83 180 top
R42  [0603-C]  68.07,41.91 180 bottom
R43  [0603-C]  45.21,40.64 180 bottom
R44  [0402-C]  67.63,38.1 180 top
R45  [0402-C]  44.77,36.83 180 top
R46  [0603-C]  61.72,41.91 180 bottom
R47  [0603-C]  38.86,38.73 180 bottom
R48  [0402-C]  61.28,38.1 180 top
R49  [0402-C]  38.42,34.92 180 top
R50  [0603-C]  56.64,41.91 180 bottom
R51  [0603-C]  33.78,38.73 180 bottom
R52  [0402-C]  56.2,38.1 180 top
R53  [0402-C]  33.34,34.92 180 top
R54  [0603-C]  28.45,15.24 0 bottom
R55  [0603-C]  51.31,16.51 0 bottom
R56  [0402-C]  28.89,19.05 0 top
R57  [0402-C]  51.75,20.32 0 top
R58  [0603-C]  33.53,15.24 0 bottom
R59  [0603-C]  56.39,16.51 0 bottom
R60  [0402-C]  33.97,19.05 0 top
R61  [0402-C]  56.83,20.32 0 top
R62  [0603-C]  39.88,15.24 0 bottom
R63  [0603-C]  62.74,18.41 0 bottom
R64  [0402-C]  40.32,19.05 0 top
R65  [0402-C]  63.18,22.23 0 top
R66  [0603-C]  44.96,15.24 0 bottom
R67  [0603-C]  67.82,18.41 0 bottom
R68  [0402-C]  45.4,19.05 0 top
R69  [0402-C]  68.26,22.23 0 top
RN1  [4X0402ARV341]  20.95,35.88 270 bottom
RN2  [4X0402ARV341]  80.64,21.27 90 bottom
RN3  [EXB24V]  13.65,20.64 90 bottom
RN4  [EXB24V]  22.99,22.86 0 bottom
RN5  [EXB24V]  95.57,20.32 0 bottom
RN6  [EXB24V]  78.61,34.29 180 bottom
RN7  [EXB14V]  91.25,53.34 0 top
RN8  [EXB24V]  21.59,26.99 270 bottom
RN9  [EXB24V]  44.45,25.4 180 bottom
RN10  [EXB24V]  21.59,28.89 270 bottom
RN11  [EXB24V]  82.55,26.67 0 bottom
RN12  [EXB24V]  57.15,31.75 0 bottom
RN13  [EXB24V]  88.58,16.19 180 bottom
S1  SKSNLAE010  [SKSNLAE010]  10.79,56.9 180 bottom
SD1  MICRO-SD-2CD  [TF-MICRO-SD_PP2]  85.72,7.62 90 top
U1  TXS0102  [X2SON-8]  88.58,6.35 90 bottom
U2  PCA9306  [UDFN-8]  23.49,35.88 180 top
U3  PCA9306  [UDFN-8]  78.1,21.27 0 top
U4  IP4251CZ16-8-TTL  [SON40P135X330X55-17N]  92.07,6.35 270 bottom
U5  FT231  [QFN65P400X400X100-21N]  91.44,41.27 0 bottom
U6  MCP4728-E/UN  [SOP50P490X110-10N]  27.3,35.88 90 bottom
U7  LM75BGD  [SOT996-2/3]  23.49,19.05 180 bottom
U8  FXLH1T45  [MICROPAK-6]  94.93,48.89 0 top
U9  MCP4728-E/UN  [SOP50P490X110-10N]  74.3,21.27 270 bottom
U10  LM75BGD  [SOT996-2/3]  78.1,38.1 0 bottom
U11  AP22966  [V-DFN3020-14]  67.82,13.97 90 top
U12  AP22966  [V-DFN3020-14]  33.78,43.18 270 top
U13  MIC94040  [MLF-4]  10.79,52.07 270 top
U14  NTLUD4C26N  [UDFN6]  87.95,30.8 90 top
U15  LTC4365  [DFN8]  96.2,32.38 270 top
U16  MIC94040  [MLF-4]  10.79,5.08 90 top
U17  PMEG2020CPAS  [DFN2020D-3]  91.12,28.57 180 top
U18  PMEG2020CPAS  [DFN2020D-3]  25.08,28.57 180 bottom
U19  MIC94040  [MLF-4]  98.42,48.26 180 bottom
U20  LT1965  [DFN3X3_8LEAD]  78.74,28.57 180 bottom
U21  PMEG2020CPAS  [DFN2020D-3]  98.42,45.72 180 bottom
U22  NTLUD4C26N  [UDFN6]  87.95,26.35 90 top
U23  PAC1720  [DFN3X3_10LEAD]  90.81,20.32 0 bottom
U25  LTC4365  [DFN8]  96.2,24.77 90 top
U27  MCP23009  [QFN50P300X300X80-17N]  19.05,35.88 45 top
U28  MCP23009  [QFN50P300X300X80-17N]  82.55,21.27 225 top
U29  AP7312-3333W6-7  [DFN2018-6]  80.01,43.81 0 top
U30  AP7312-3333W6-7  [DFN2018-6]  21.59,13.33 180 top
U31  AP7312-3333W6-7  [DFN2018-6]  82.55,43.81 0 top
U32  AP7312-3333W6-7  [DFN2018-6]  19.05,13.33 180 top
U33  AP7312-3333W6-7  [DFN2018-6]  19.05,19.05 180 top
U34  AP7312-3333W6-7  [DFN2018-6]  82.55,38.1 0 top
U35  ADS1018  [X2QFN-10]  5.84,46.99 90 top
U36  ADS1018  [X2QFN-10]  5.08,20.45 180 top
U37  MCP46X2  [DFN-10]  11.11,46.99 90 top
U38  MCP46X2  [DFN-10]  5.08,25.72 180 top
U39  ADS1018  [X2QFN-10]  5.08,30.61 180 top
U40  ADS1018  [X2QFN-10]  11.94,10.16 270 top
U41  MCP46X2  [DFN-10]  5.08,35.88 180 top
U42  MCP46X2  [DFN-10]  6.67,10.16 270 top
U43  ADS1018  [X2QFN-10]  68.07,41.27 90 top
U44  ADS1018  [X2QFN-10]  45.21,40 90 top
U45  MCP46X2  [DFN-10]  73.34,41.27 90 top
U46  MCP46X2  [DFN-10]  50.48,40 90 top
U47  ADS1018  [X2QFN-10]  56.64,41.27 90 top
U48  ADS1018  [X2QFN-10]  33.78,38.1 90 top
U49  MCP46X2  [DFN-10]  61.91,41.27 90 top
U50  MCP46X2  [DFN-10]  39.05,38.1 90 top
U51  ADS1018  [X2QFN-10]  33.53,15.88 270 top
U52  ADS1018  [X2QFN-10]  56.39,17.14 270 top
U53  MCP46X2  [DFN-10]  28.26,15.88 270 top
U54  MCP46X2  [DFN-10]  51.12,17.14 270 top
U55  ADS1018  [X2QFN-10]  44.96,15.88 270 top
U56  ADS1018  [X2QFN-10]  67.82,19.05 270 top
U57  MCP46X2  [DFN-10]  39.69,15.88 270 top
U58  MCP46X2  [DFN-10]  62.55,19.05 270 top
U59  24AA00OT  [SOT23-5L]  98.42,20.32 0 bottom
U_I  TPS82085  [MICROSIP]  73.72,38.1 270 bottom
U_J  TPS82085DD  [MICROSIP-DD]  68.64,38.1 270 bottom
U_K  TPS82085  [MICROSIP]  62.29,38.1 270 bottom
U_L  TPS82085DD  [MICROSIP-DD]  57.21,38.1 270 bottom
U_M  TPS82085  [MICROSIP]  50.86,36.83 270 bottom
U_N  TPS82085DD  [MICROSIP-DD]  45.78,36.83 270 bottom
U_O  TPS82085  [MICROSIP]  39.43,34.92 270 bottom
U_P  TPS82085DD  [MICROSIP-DD]  34.35,34.92 270 bottom
U_Q  TPS82085  [MICROSIP]  27.88,19.05 90 bottom
U_R  TPS82085DD  [MICROSIP-DD]  32.96,19.05 90 bottom
U_S  TPS82085  [MICROSIP]  39.31,19.05 90 bottom
U_T  TPS82085DD  [MICROSIP-DD]  44.39,19.05 90 bottom
U_U  TPS82085  [MICROSIP]  50.74,20.32 90 bottom
U_V  TPS82085DD  [MICROSIP-DD]  55.82,20.32 90 bottom
U_W  TPS82085  [MICROSIP]  62.17,22.23 90 bottom
U_X  TPS82085DD  [MICROSIP-DD]  67.25,22.23 90 bottom
UA  TPS82085  [MICROSIP]  11.49,43.81 270 bottom
UB  TPS82085DD  [MICROSIP-DD]  6.41,43.81 270 bottom
UC  TPS82085  [MICROSIP]  8.25,36.26 180 bottom
UD  TPS82085DD  [MICROSIP-DD]  8.25,31.18 180 bottom
UE  TPS82085  [MICROSIP]  8.25,26.1 180 bottom
UF  TPS82085DD  [MICROSIP-DD]  8.25,21.02 180 bottom
UG  TPS82085  [MICROSIP]  6.29,13.33 90 bottom
UH  TPS82085DD  [MICROSIP-DD]  11.37,13.33 90 bottom
USB  5_USB_3S  [MICRO-AB-H-SMT]  101.6,41.27 90 top
X1  PICO-SPOX-5  [PICO-SPOX-5]  97.79,28.57 90 bottom
ZED  µZ-FCI-CONONLY  [µZ-CONONLY]  50.8,28.57 180 bottom

## Library data of the parts
BETA ZED = microzed
C1-C131 D1 D2 FB1-FB26 R1-R19 R22-R69 = generic-rcl
CNW CSE = spx3819; MPN: SPX3819M5-L; OC_FARNELL: 1831948; OC_NEWARK: 23R9689; PACKAGE: SOT-23-5; SUPPLIER: EXAR
D3 D4 = pmeg2010beld
F1-F8 = fiducial
IO_C IO_E IO_W = microchip-exp
IOC PC_C PC_E PC_W = pic16f15386
JP1 = pinhead-2
LED = led
LOGO2 = ohw-logo
PB-NW PB-SE = df12
PWR-NE PWR-NW PWR-SE PWR-SW = pincon
RN1-RN13 = resistor-dil; OC_FARNELL: unknown; OC_NEWARK: unknown
S1 = switch
SD1 = micro-sd
U1 U8 = lvltrans
U2 U3 = gtl2002
U4 = emifil; MPN: IP4251CZ16-8-TTL; OC_FARNELL: 1972684; OC_NEWARK: 58T9585; PACKAGE: SON-16; SUPPLIER: NXP
U5 = ft23x
U6 U9 = mcp4728; MPN: MCP4728-E/UN; OC_FARNELL: 1800217; OC_NEWARK: 08R1808; PACKAGE: MSOP-10; SUPPLIER: MICROCHIP
U7 U10 = lm75
U11 U12 = AP22966
U13 U16 U19 = load_switch
U14 U22 = ntlud4c26n
U15 U25 = ltc4365
U17 U18 U21 = pmeg2020cpas
U20 = lt1965
U23 = pac1720
U27 U28 = mcp23009
U29-U34 = ldo
U35 U36 U39 U40 U43 U44 U47 U48 U51 U52 U55 U56 = ADS1x18
U37 U38 U41 U42 U45 U46 U49 U50 U53 U54 U57 U58 = digipot
U59 = microchip; MF: MICROCHIP; MPN: 24AA00T-I/OTG; OC_FARNELL: 1331264; OC_NEWARK: 89H3038
U_I U_J U_K U_L U_M U_N U_O U_P U_Q U_R U_S U_T U_U U_V U_W U_X UA UB UC UD UE UF UG UH = TPS82085
USB = usb; TE: 1981584
X1 = pico-spox